# Altium PCB sinking-clock_LED-PCB.PcbDoc (part 2 of 2)
Units mm, origin at the board's own origin, x right, y up, seen from the top; angles counter-clockwise.
Board outline 156.7 x 83 mm, 2 copper layers (Top Layer, Bottom Layer); 144 components, 146 nets, 484 pads, 126 vias.
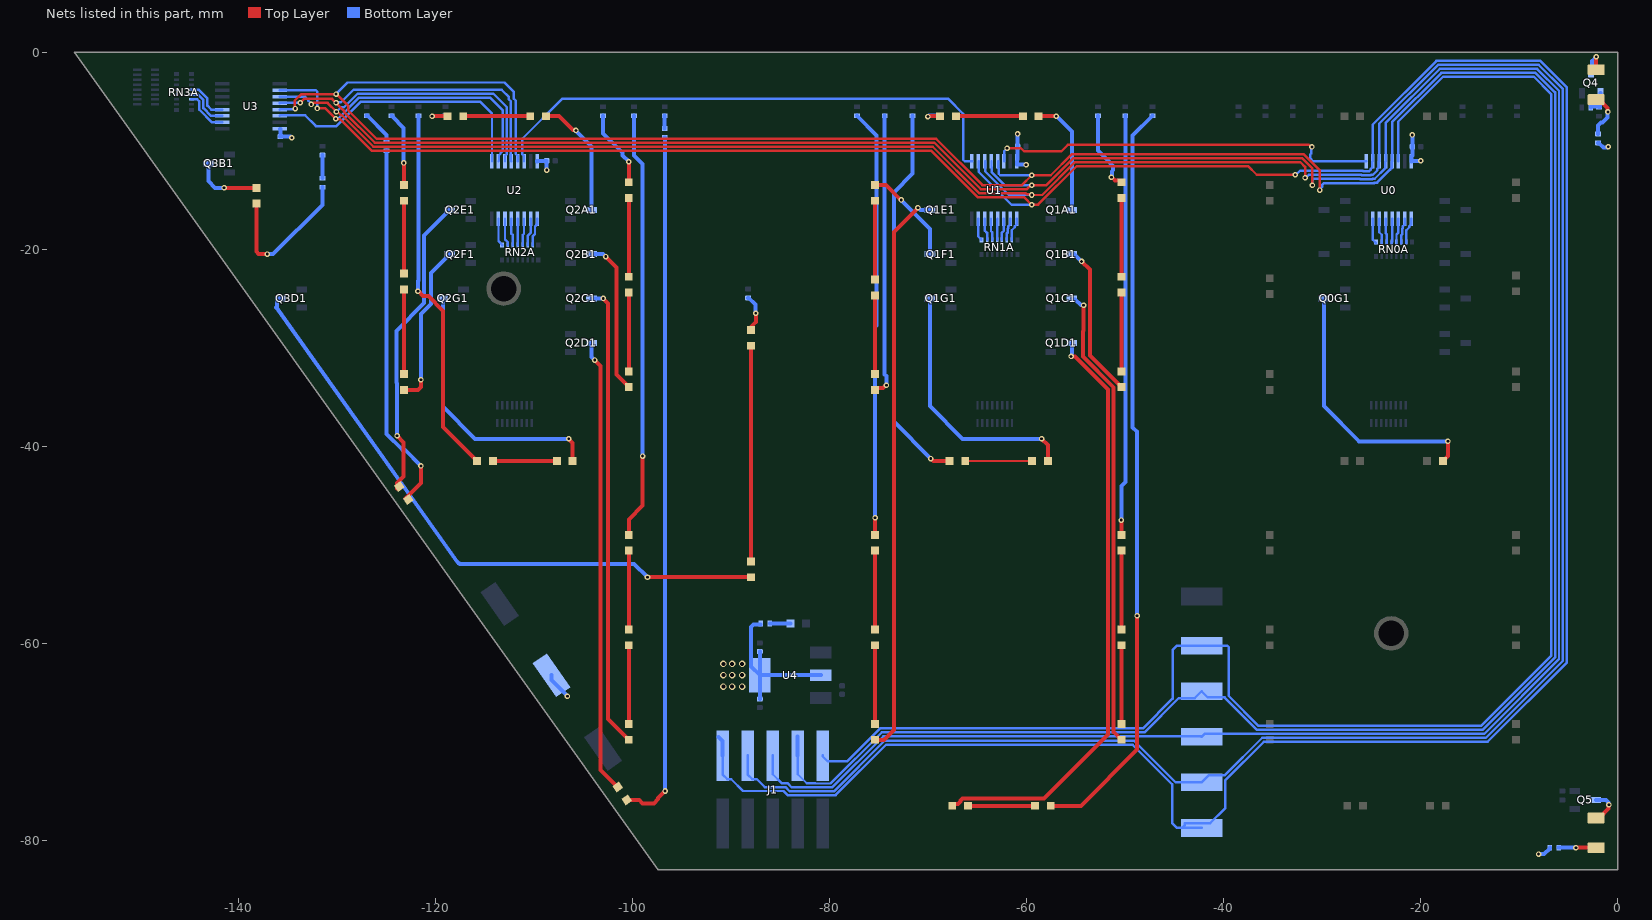
[diagram p2: the nets of this part, all layers, seen from the top]

## Via types
v1: diameter 0.559, hole 0.279, Top Layer to Bottom Layer, 104 vias
v2: diameter 0.66, hole 0.406, Top Layer to Bottom Layer, 22 vias

## Nets (pads, with @x,y where several pads share a name; then routed paths per layer and width w, separated by ;. In a path a pad name is that pad's centre, name@x,y a point inside that pad or via, vN(x,y) a via of type N, cw(c..) or ccw(c..) an arc to the next point about the centre after c; other vN are vias at no path point) (continued)
NetD0G2_2: D0G2.2 Q0G1.3 | length 27.2
  Top Layer w0.406: D0G2.2@-17.755,-41.5 -17.25,-40.995 v1(-17.25,-39.5)
  Bottom Layer w0.406: Q0G1.3@-29.82,-25 -29.82,-35.93 -26.25,-39.5 v1(-17.25,-39.5)
NetD1A1_1: D1A1.1 R1A2.1 | length 2.6
  Top Layer w0.406: v1(-70.032,-6.541) -69.991,-6.541 -69.927,-6.478 -68.823,-6.478 D1A1.1@-68.8,-6.5
  Bottom Layer w0.406: v1(-70.032,-6.541) -69.991,-6.541 -69.905,-6.455 R1A2.1@-68.75,-6.455
NetD1A1_2: D1A1.2 D1A2.1 | length 6.8
  Top Layer w0.406: D1A1.2@-67.2,-6.5 D1A2.1@-60.4,-6.5
NetD1A2_2: D1A2.2 Q1A1.3 | length 12
  Top Layer w0.406: D1A2.2@-58.8,-6.5 v1(-57,-6.5)
  Bottom Layer w0.406: v1(-57,-6.5) -55.43,-8.07 Q1A1.3@-55.43,-16
NetD1B1_1: D1B1.1 R1B2.1 | length 8.1
  Top Layer w0.406: v1(-51.4,-12.699) -51.359,-12.699 -51.055,-13.003 -50.597,-13.003 D1B1.1@-50.4,-13.2
  Bottom Layer w0.406: R1B2.1@-52.75,-6.455 -52.75,-10 -51.494,-11.256 -51.494,-11.313 -51.244,-11.563 -51.244,-11.969 -51.371,-12.096 -51.371,-12.67 v1(-51.4,-12.699)
NetD1B1_2: D1B1.2 D1B2.1 | length 8
  Top Layer w0.406: D1B2.1@-50.4,-22.8 D1B1.2@-50.4,-14.8
NetD1B2_2: D1B2.2 D1B3.1 | length 8
  Top Layer w0.406: D1B3.1@-50.4,-32.4 D1B2.2@-50.4,-24.4
NetD1B3_2: D1B3.2 Q1B1.3 | length 15.7
  Top Layer w0.406: v1(-54.44,-21.25) -53.605,-22.085 -53.605,-30.795 D1B3.2@-50.4,-34
  Bottom Layer w0.406: Q1B1.3@-55.43,-20.5 -55.19,-20.5 v1(-54.44,-21.25)
NetD1C1_1: D1C1.1 R1C2.1 | length 42.7
  Top Layer w0.406: D1C1.1@-50.4,-49 v1(-50.4,-47.5)
  Bottom Layer w0.406: v1(-50.4,-47.5) -50.4,-44.041 -50,-43.641 R1C2.1@-50,-6.455
NetD1C1_2: D1C1.2 D1C2.1 | length 7.7
  Top Layer w0.406: D1C2.1@-50.4,-58.5 D1C1.2@-50.4,-50.75
NetD1C2_2: D1C2.2 D1C3.1 | length 8
  Top Layer w0.406: D1C3.1@-50.4,-68.2 D1C2.2@-50.4,-60.2
NetD1C3_2: D1C3.2 Q1C1.3 | length 47.2
  Top Layer w0.406: v1(-54.24,-25.7) -54.24,-28.277 -54.309,-28.346 -54.309,-30.881 -51.172,-34.019 -51.172,-69.028 D1C3.2@-50.4,-69.8
  Bottom Layer w0.406: Q1C1.3@-55.43,-25 -55.328,-25.102 -55.088,-25.102 -54.519,-25.671 -54.269,-25.671 v1(-54.24,-25.7)
NetD1D1_1: D1D1.1 R1D2.1 | length 76.5
  Top Layer w0.406: D1D1.1@-57.564,-76.5 -54.5,-76.5 -48.8,-70.8 v1(-48.8,-57.2)
  Bottom Layer w0.406: v1(-48.8,-57.2) -48.8,-38.532 -49.25,-38.082 -49.25,-8.455 R1D2.1@-47.25,-6.455
NetD1D1_2: D1D1.2 D1D2.1 | length 6.8
  Top Layer w0.406: D1D2.1@-65.964,-76.5 D1D1.2@-59.164,-76.5
NetD1D2_2: D1D2.2 Q1D1.3 | length 60.4
  Top Layer w0.406: D1D2.2@-67.564,-76.5 -67.367,-76.303 -66.958,-76.303 -66.72,-76.065 -66.72,-75.953 -66.511,-75.744 -58.244,-75.744 -51.75,-69.25 -51.75,-34.25 -55.089,-30.911 -55.471,-30.911 v1(-55.5,-30.881)
  Bottom Layer w0.406: v1(-55.5,-30.881) -55.5,-30.84 -55.43,-30.77 Q1D1.3@-55.43,-29.5
NetD1E1_1: D1E1.1 R1E2.1 | length 43.4
  Top Layer w0.406: D1E1.1@-75.4,-49 v1(-75.4,-47.25)
  Bottom Layer w0.406: R1E2.1@-77.25,-6.455 -75.25,-8.455 -75.25,-27.757 -75.4,-27.907 v1(-75.4,-47.25)
NetD1E1_2: D1E1.2 D1E2.1 | length 7.5
  Top Layer w0.406: D1E2.1@-75.4,-58.5 D1E1.2@-75.4,-51
NetD1E2_2: D1E2.2 D1E3.1 | length 8
  Top Layer w0.406: D1E3.1@-75.4,-68.2 D1E2.2@-75.4,-60.2
NetD1E3_2: D1E3.2 Q1E1.3 | length 57.6
  Top Layer w0.406: D1E3.2@-75.4,-69.8 -74.5,-69.8 -73.5,-68.8 -73.5,-18.25 v1(-71.051,-15.801)
  Bottom Layer w0.406: v1(-71.051,-15.801) -71.01,-15.801 -70.811,-16 Q1E1.3@-69.82,-16
NetD1F1_1: D1F1.1 R1F2.1 | length 28.8
  Top Layer w0.406: D1F1.1@-75.4,-34.286 -75.203,-34.089 -74.578,-34.089 -74.291,-33.802 v1(-74.25,-33.802)
  Bottom Layer w0.406: R1F2.1@-74.417,-6.455 -74.417,-32.71 -74.25,-32.877 v1(-74.25,-33.802)
NetD1F1_2: D1F1.2 D1F2.1 | length 8
  Top Layer w0.406: D1F1.2@-75.4,-32.686 D1F2.1@-75.4,-24.686
NetD1F2_2: D1F2.2 D1F3.1 | length 8
  Top Layer w0.406: D1F2.2@-75.4,-23.086 D1F3.1@-75.4,-15.086
NetD1F3_2: D1F3.2 Q1F1.3 | length 10
  Top Layer w0.406: D1F3.2@-75.4,-13.486 -75.393,-13.493 -74.298,-13.493 -72.791,-15 v1(-72.75,-15)
  Bottom Layer w0.406: v1(-72.75,-15) -69.82,-17.93 Q1F1.3@-69.82,-20.5
NetD1G1_1: D1G1.1 R1G2.1 | length 39.1
  Top Layer w0.406: v1(-69.75,-41.25) -69.709,-41.25 -69.459,-41.5 D1G1.1@-67.85,-41.5
  Bottom Layer w0.406: R1G2.1@-71.583,-6.455 -71.583,-12.333 -73.5,-14.25 -73.5,-37.5 v1(-69.75,-41.25)
NetD1G1_2: D1G1.2 D1G2.1 | length 6.8
  Top Layer w0.25: D1G1.2@-66.25,-41.5 D1G2.1@-59.45,-41.5
NetD1G2_2: D1G2.2 Q1G1.3 | length 26.1
  Top Layer w0.406: v1(-58.5,-39.25) -57.85,-39.9 D1G2.2@-57.85,-41.5
  Bottom Layer w0.406: Q1G1.3@-69.82,-25 -69.82,-35.93 -66.5,-39.25 v1(-58.5,-39.25)
NetD2A1_1: D2A1.1 R2A2.1 | length 3
  Top Layer w0.406: v1(-120.375,-6.5) D2A1.1@-118.8,-6.5
  Bottom Layer w0.406: v1(-120.375,-6.5) -120.352,-6.478 -119.023,-6.478 R2A2.1@-119,-6.455
NetD2A1_2: D2A1.2 D2A2.1 | length 6.8
  Top Layer w0.406: D2A1.2@-117.2,-6.5 D2A2.1@-110.4,-6.5
NetD2A2_2: D2A2.2 Q2A1.3 | length 12.3
  Top Layer w0.406: D2A2.2@-108.8,-6.5 -107.5,-6.5 -106.086,-7.914 -105.795,-7.914 v1(-105.766,-7.943)
  Bottom Layer w0.406: v1(-105.766,-7.943) -105.766,-7.984 -104.18,-9.57 Q2A1.3@-104.18,-16
NetD2B1_1: D2B1.1 R2B2.1 | length 7.8
  Top Layer w0.406: D2B1.1@-100.4,-13.2 v1(-100.4,-11.116)
  Bottom Layer w0.406: R2B2.1@-103,-6.455 -103,-8.25 -101.04,-10.21 -101.04,-10.476 v1(-100.4,-11.116)
NetD2B1_2: D2B1.2 D2B2.1 | length 8
  Top Layer w0.406: D2B2.1@-100.4,-22.8 D2B1.2@-100.4,-14.8
NetD2B2_2: D2B2.2 D2B3.1 | length 8
  Top Layer w0.406: D2B3.1@-100.4,-32.4 D2B2.2@-100.4,-24.4
NetD2B3_2: D2B3.2 Q2B1.3 | length 15.8
  Top Layer w0.406: v1(-102.75,-20.75) -101.659,-21.841 -101.659,-32.741 D2B3.2@-100.4,-34
  Bottom Layer w0.406: Q2B1.3@-104.18,-20.5 -103,-20.5 v1(-102.75,-20.75)
NetD2C1_1: D2C1.1 R2C2.1 | length 43.5
  Top Layer w0.406: D2C1.1@-100.4,-49 -100.4,-47.441 -99,-46.041 v1(-99,-41)
  Bottom Layer w0.406: R2C2.1@-99.875,-6.455 -99.875,-10.477 -99,-11.352 v1(-99,-41)
NetD2C1_2: D2C1.2 D2C2.1 | length 8
  Top Layer w0.406: D2C2.1@-100.4,-58.6 D2C1.2@-100.4,-50.6
NetD2C2_2: D2C2.2 D2C3.1 | length 8
  Top Layer w0.406: D2C3.1@-100.4,-68.2 D2C2.2@-100.4,-60.2
NetD2C3_2: D2C3.2 Q2C1.3 | length 47.1
  Top Layer w0.406: v1(-103,-25) -102.5,-25.5 -102.5,-67.7 D2C3.2@-100.4,-69.8
  Bottom Layer w0.406: Q2C1.3@-104.18,-25 v1(-103,-25)
NetD2D1_1: D2D1.1 R2D2.1 | length 71
  Top Layer w0.406: D2D1.1@-100.609,-75.901 -99.337,-75.901 -98.989,-76.25 -97.85,-76.25 -97.429,-75.829 -97.429,-75.715 v1(-96.714,-75)
  Bottom Layer w0.406: R2D2.1@-96.75,-8.66 -96.732,-8.678 -96.732,-74.982 v1(-96.714,-75)
NetD2D1_2: D2D1.2 Q2D1.3 | length 46.2
  Top Layer w0.406: v1(-103.86,-31.25) -103.25,-31.86 -103.25,-72.868 D2D1.2@-101.527,-74.591
  Bottom Layer w0.406: Q2D1.3@-104.18,-29.5 -104.18,-30.93 v1(-103.86,-31.25)
NetD2E1_1: D2E1.1 R2E2.1 | length 37.5
  Top Layer w0.406: D2E1.1@-123.046,-45.296 -121.5,-43.75 v1(-121.5,-42)
  Bottom Layer w0.406: R2E2.1@-125,-10 -125,-38.75 -123.39,-40.36 -123.14,-40.36 v1(-121.5,-42)
NetD2E1_2: D2E1.2 Q2E1.3 | length 31.3
  Top Layer w0.406: D2E1.2@-123.926,-44.313 -123.931,-44.308 -123.931,-43.755 -123.25,-43.074 -123.25,-39.602 v1(-123.926,-38.926)
  Bottom Layer w0.406: v1(-123.926,-38.926) -123.926,-33.623 -124,-33.549 -124,-28.287 -121.169,-25.456 -121.169,-18.599 -118.912,-16.342 -118.912,-16.102 -118.81,-16 Q2E1.3@-118.57,-16
NetD2F1_1: D2F1.1 R2F2.1 | length 7.6
  Top Layer w0.406: v1(-123.25,-11.25) -123.25,-11.291 -123.2,-11.341 D2F1.1@-123.2,-13.486
  Bottom Layer w0.406: R2F2.1@-124.5,-6.455 -124.445,-6.455 -124.403,-6.497 -124.403,-6.552 -123.25,-7.705 v1(-123.25,-11.25)
NetD2F1_2: D2F1.2 D2F2.1 | length 7.4
  Top Layer w0.406: D2F2.1@-123.2,-22.486 D2F1.2@-123.2,-15.086
NetD2F2_2: D2F2.2 D2F3.1 | length 8.6
  Top Layer w0.406: D2F3.1@-123.2,-32.686 D2F2.2@-123.2,-24.086
NetD2F3_2: D2F3.2 Q2F1.3 | length 16.5
  Top Layer w0.406: D2F3.2@-123.2,-34.286 -121.786,-34.286 -121.5,-34 v1(-121.5,-33.25)
  Bottom Layer w0.406: v1(-121.5,-33.25) -121.5,-26.577 -120.5,-25.577 -120.5,-22.43 Q2F1.3@-118.57,-20.5
NetD2G1_1: D2G1.1 R2G2.1 | length 37.9
  Top Layer w0.406: v1(-121.804,-24.265) -121.763,-24.265 -121.268,-24.76 -120.755,-24.76 -119.25,-26.265 -119.25,-38.05 D2G1.1@-115.8,-41.5
  Bottom Layer w0.406: v1(-121.804,-24.265) -121.804,-23.227 -121.75,-23.173 R2G2.1@-121.75,-6.455
NetD2G1_2: D2G1.2 D2G2.1 | length 6.5
  Top Layer w0.406: D2G1.2@-114.2,-41.5 D2G2.1@-107.7,-41.5
NetD2G2_2: D2G2.2 Q2G1.3 | length 27.4
  Top Layer w0.406: v1(-106.5,-39.25) -106.5,-39.291 -106.1,-39.691 D2G2.2@-106.1,-41.5
  Bottom Layer w0.406: Q2G1.3@-119.267,-25.102 -119.267,-35.983 -116,-39.25 v1(-106.5,-39.25)
NetD3B1_1: D3B1.1 R3B2.1 | length 15.6
  Top Layer w0.406: D3B1.1@-138.2,-15.372 -138.202,-15.374 -138.202,-20.256 -137.964,-20.494 -137.106,-20.494 v1(-137.1,-20.5)
  Bottom Layer w0.406: v1(-137.1,-20.5) -136.5,-20.5 -131.5,-15.5 R3B2.1@-131.5,-13.705
NetD3B1_2: D3B1.2 Q3B1.3 | length 6.9
  Top Layer w0.406: v1(-141.478,-13.772) D3B1.2@-138.2,-13.772
  Bottom Layer w0.406: Q3B1.3@-143.07,-11.3 -143.07,-13.102 -142.4,-13.772 v1(-141.478,-13.772)
NetD3D1_1: D3D1.1 R3D2.1 | length 3.5
  Top Layer w0.406: D3D1.1@-88,-27.896 -87.511,-27.406 v1(-87.511,-26.5)
  Bottom Layer w0.406: R3D2.1@-88.278,-24.939 -88.223,-24.939 -87.54,-25.622 -87.54,-26.471 v1(-87.511,-26.5)
NetD3D1_2: D3D1.2 D3D2.1 | length 21.9
  Top Layer w0.406: D3D2.1@-88,-51.7 D3D1.2@-88,-29.8
NetD3D2_2: D3D2.2 Q3D1.3 | length 63.4
  Top Layer w0.406: v1(-98.5,-53.3) -88.05,-53.3 D3D2.2@-88,-53.25
  Bottom Layer w0.406: Q3D1.3@-135.75,-25 -135.99,-25 -136.092,-25.102 -136.092,-25.807 -136.2,-25.915 -117.783,-51.77 ccw(c-117.452,-51.535) -117.452,-51.941 -99.859,-51.941 v1(-98.5,-53.3)
NetD4_1: D4.1 R6.2 | length 4.7
  Top Layer w0.406: D4.1@-2.2,-4.81 -1.885,-4.81 -1.036,-5.659 -1.036,-6.043 v1(-1.007,-6.072)
  Bottom Layer w0.406: R6.2@-2,-8.295 -2,-7.44 -1.716,-7.157 -1.557,-7.157 -1.036,-6.636 -1.036,-6.101 v1(-1.007,-6.072)
NetD4_2: D4.2 Q4.3 | length 3.1
  Top Layer w0.406: D4.2@-2.2,-1.79 v1(-2.2,-0.455)
  Bottom Layer w0.406: Q4.3@-2.7,-2.03 -2.598,-1.928 -2.598,-0.895 -2.2,-0.497 v1(-2.2,-0.455)
NetD5_1: D5.1 R7.2 | length 3.8
  Top Layer w0.406: v1(-4.25,-80.76) D5.1@-2.2,-80.76
  Bottom Layer w0.406: R7.2@-6,-80.76 v1(-4.25,-80.76)
NetD5_2: D5.2 Q5.3 | length 3.7
  Top Layer w0.406: D5.2@-2.2,-77.74 -1.885,-77.74 -0.929,-76.784 -0.929,-76.429 v1(-0.9,-76.4)
  Bottom Layer w0.406: Q5.3@-2.23,-75.9 -1.208,-75.9 -0.929,-76.179 -0.929,-76.371 v1(-0.9,-76.4)
NetD6_1: D6.1 R8.1 | length 2.1
  Bottom Layer w0.406: R8.1@-86.069,-58 D6.1@-83.979,-58
NetQ4_1: Q4.1 R9.2 R10.2 | length 2.4
  Bottom Layer w0.406: R10.2@-2.745,-5.6 -2.745,-5.576 -2.703,-5.534 R9.2@-1.929,-5.534 ; R9.2@-1.929,-5.557 -1.832,-5.557 -1.832,-5.366 -1.785,-5.319 Q4.1@-1.785,-4.17
NetR2D1_1: R2D1.1 R2D2.2 | length 1.3
  Bottom Layer w0.406: R2D2.2@-96.75,-7.75 R2D1.1@-96.75,-6.455
NetR2E1_1: R2E1.1 R2E2.2 | length 3.5
  Bottom Layer w0.406: R2E1.1@-127,-6.455 -126.945,-6.455 -125,-8.4 R2E2.2@-125,-9.09
NetR3B1_1: R3B1.1 R3B2.2 | length 2.3
  Bottom Layer w0.406: R3B2.2@-131.5,-12.795 R3B1.1@-131.5,-10.455
NetRN0A_9: RN0A.9 U0.7 | length 2.6
  Bottom Layer w0.25: U0.7@-24.876,-16.921 -24.876,-19.046 -24.557,-19.365 RN0A.9@-24.557,-19.402
NetRN0A_10: RN0A.10 U0.6 | length 2.6
  Bottom Layer w0.25: U0.6@-24.215,-16.921 -24.215,-18.284 -23.97,-18.529 RN0A.10@-23.97,-19.402
NetRN0A_11: RN0A.11 U0.5 | length 2.5
  Bottom Layer w0.25: U0.5@-23.58,-16.921 -23.58,-18.35 -23.47,-18.46 RN0A.11@-23.47,-19.402
NetRN0A_12: RN0A.12 U0.4 | length 2.5
  Bottom Layer w0.25: RN0A.12@-22.97,-19.402 -22.97,-19.277 -22.92,-19.227 U0.4@-22.92,-16.921
NetRN0A_13: RN0A.13 U0.3 | length 2.6
  Bottom Layer w0.25: RN0A.13@-22.47,-19.402 -22.47,-18.497 -22.285,-18.312 U0.3@-22.285,-16.921
NetRN0A_14: RN0A.14 U0.2 | length 2.6
  Bottom Layer w0.25: RN0A.14@-21.97,-19.402 -21.97,-18.578 -21.882,-18.49 -21.882,-17.917 -21.83,-17.864 -21.83,-17.685 -21.624,-17.48 U0.2@-21.624,-16.921
NetRN0A_15: RN0A.15 U0.1 | length 2.7
  Bottom Layer w0.25: RN0A.15@-21.47,-19.402 -21.47,-18.073 -21.169,-17.773 -21.169,-17.679 -21.023,-17.533 -21.017,-17.533 -20.964,-17.48 U0.1@-20.964,-16.921
NetRN1A_9: RN1A.9 U1.7 | length 2.3
  Bottom Layer w0.25: U1.7@-64.926,-16.921 -64.926,-18.696 -64.607,-19.015 RN1A.9@-64.607,-19.052
NetRN1A_10: RN1A.10 U1.6 | length 2.2
  Bottom Layer w0.25: U1.6@-64.265,-16.921 -64.265,-18.109 -64.02,-18.354 RN1A.10@-64.02,-19.052
NetRN1A_11: RN1A.11 U1.5 | length 2.2
  Bottom Layer w0.25: U1.5@-63.63,-16.921 -63.63,-18.175 -63.52,-18.285 RN1A.11@-63.52,-19.052
NetRN1A_12: RN1A.12 U1.4 | length 2.2
  Bottom Layer w0.25: RN1A.12@-63.02,-19.052 -63.02,-16.971 U1.4@-62.97,-16.921
NetRN1A_13: RN1A.13 U1.3 | length 2.2
  Bottom Layer w0.25: RN1A.13@-62.52,-19.052 -62.52,-18.322 -62.335,-18.137 U1.3@-62.335,-16.921
NetRN1A_14: RN1A.14 U1.2 | length 2.3
  Bottom Layer w0.25: RN1A.14@-62.02,-19.052 -62.02,-18.403 -61.932,-18.315 -61.932,-17.917 -61.88,-17.864 -61.88,-17.685 -61.674,-17.48 U1.2@-61.674,-16.921
NetRN1A_15: RN1A.15 U1.1 | length 2.3
  Bottom Layer w0.25: RN1A.15@-61.52,-19.052 -61.52,-18.073 -61.219,-17.773 -61.219,-17.679 -61.073,-17.533 -61.067,-17.533 -61.014,-17.48 U1.1@-61.014,-16.921
NetRN2A_9: RN2A.9 U2.7 | length 2.8
  Bottom Layer w0.25: U2.7@-113.626,-16.921 -113.626,-19.179 -113.257,-19.548 RN2A.9@-113.257,-19.585
NetRN2A_10: RN2A.10 U2.6 | length 2.8
  Bottom Layer w0.25: U2.6@-112.965,-16.921 -112.965,-19.002 -112.67,-19.298 RN2A.10@-112.67,-19.585
NetRN2A_11: RN2A.11 U2.5 | length 2.7
  Bottom Layer w0.25: U2.5@-112.33,-16.921 -112.33,-18.416 -112.17,-18.577 RN2A.11@-112.17,-19.585
NetRN2A_12: RN2A.12 U2.4 | length 2.7
  Bottom Layer w0.25: RN2A.12@-111.67,-19.585 U2.4@-111.67,-16.921
NetRN2A_13: RN2A.13 U2.3 | length 2.7
  Bottom Layer w0.25: RN2A.13@-111.17,-19.585 -111.17,-18.564 -111.035,-18.429 U2.3@-111.035,-16.921
NetRN2A_14: RN2A.14 U2.2 | length 2.8
  Bottom Layer w0.25: RN2A.14@-110.67,-19.585 -110.67,-18.644 -110.374,-18.349 U2.2@-110.374,-16.921
NetRN2A_15: RN2A.15 U2.1 | length 2.9
  Bottom Layer w0.25: RN2A.15@-110.17,-19.585 -110.17,-18.713 -109.919,-18.462 -109.919,-17.679 -109.773,-17.533 -109.767,-17.533 -109.714,-17.48 U2.1@-109.714,-16.921
NetRN3A_12: RN3A.12 U3.4 | length 4.4
  Bottom Layer w0.25: RN3A.12@-144.807,-3.8 -144.065,-3.8 -143.178,-4.687 -143.178,-5.433 -142.781,-5.83 U3.4@-141.671,-5.83
NetRN3A_13: RN3A.13 U3.3 | length 4.5
  Bottom Layer w0.25: RN3A.13@-144.807,-4.3 -144.134,-4.3 -143.581,-4.853 -143.581,-5.683 -142.798,-6.465 U3.3@-141.671,-6.465
NetRN3A_14: RN3A.14 U3.2 | length 4.6
  Bottom Layer w0.25: RN3A.14@-144.807,-4.8 -144.203,-4.8 -143.983,-5.02 -143.983,-5.849 -142.707,-7.126 U3.2@-141.671,-7.126
NetU0_9: U0.9 U1.14 | length 39.9
  Top Layer w0.25: v1(-62,-9.75) -60.584,-9.75 -60.277,-10.057 -56.486,-10.057 -55.824,-9.394 -31.37,-9.394 -31.14,-9.624 v1(-31.056,-9.624)
  Bottom Layer w0.25: U1.14@-62.285,-11.079 -62.285,-10.039 -62,-9.754 v1(-62,-9.75) ; v1(-31.056,-9.624) -31.116,-9.683 -31.116,-10.278 -31.241,-10.404 -31.241,-10.759 -30.921,-11.079 U0.9@-25.536,-11.079
NetU1_9: U1.9 U2.14 | length 55.1
  Bottom Layer w0.25: U2.14@-111.035,-11.079 -111.035,-10.52 -111.215,-10.34 -111.215,-8.79 -107.175,-4.75 -67.963,-4.75 -66.443,-6.269 -66.443,-10.933 -66.297,-11.079 U1.9@-65.536,-11.079
NetU2_9: U2.9 U3.14 | length 28.4
  Bottom Layer w0.25: U3.14@-135.829,-6.465 -135.789,-6.425 -133.237,-6.425 -132.157,-7.505 -130.085,-7.505 -127.602,-5.023 -115.502,-5.023 -114.286,-6.238 U2.9@-114.286,-11.079
SHIFT_DATA_CLK: J1.8 TP6.1 U0.11 U1.11 U2.11 U3.11 | length 329.1
  Top Layer w0.25: v1(-132.627,-5.307) -132.543,-5.307 -132.389,-5.152 -130.966,-5.152 v1(-130.073,-6.045) ; v1@-130.107,-6.08 -129.955,-6.08 -129.632,-6.402 -129.529,-6.402 -126.333,-9.598 -69.541,-9.598 -64.833,-14.305 -60.126,-14.305 -59.99,-14.441 -59.606,-14.441 -59.547,-14.5 v1(-59.496,-14.5) -58.432,-14.5 -55.092,-11.16 -32.236,-11.16 -31.75,-11.646 v1(-31.75,-12.75)
  Bottom Layer w0.25: U3.11@-135.829,-4.535 -133.238,-4.535 -132.921,-4.852 -132.921,-4.929 -132.627,-5.223 v1(-132.627,-5.307) ; v1(-130.073,-6.045) -130.043,-6.045 -129.595,-5.597 -129.315,-5.597 -127.936,-4.218 -114.145,-4.218 -112.785,-5.578 -112.785,-10.34 -112.965,-10.52 U2.11@-112.965,-11.079 ; J1.8@-88.33,-71.392 -88.33,-73.327 -87.85,-73.807 -87.393,-73.807 -86.602,-74.598 -84.502,-74.598 -84.077,-75.023 -81.824,-75.023 -81.803,-75.043 -79.586,-75.043 -74.445,-69.902 -49.098,-69.902 -44.875,-74.125 TP6.1@-42.25,-74.125 -41.547,-73.422 -39.922,-73.422 -36.098,-69.598 -13.39,-69.598 -5.57,-61.777 -5.57,-3.749 -8.026,-1.293 -18.25,-1.293 -24.215,-7.258 U0.11@-24.215,-11.079 -24.268,-11.132 -24.268,-11.691 -24.42,-11.843 -24.42,-12.008 -24.858,-12.445 -25.026,-12.445 -25.077,-12.495 -25.995,-12.495 -26.046,-12.445 -31.362,-12.445 -31.666,-12.75 v1(-31.75,-12.75) ; U1.11@-64.215,-11.079 -64.212,-11.082 -64.212,-12.113 -61.825,-14.5 v1(-59.496,-14.5)
SHIFT_DATA_IN: J1.2 TP3.1 U0.14 | length 170.4
  Bottom Layer w0.25: J1.2@-80.71,-71.392 -80.71,-71.49 -80.2,-72 -78.25,-72 -74.89,-68.64 -48.209,-68.64 -45.189,-65.62 -45.189,-60.689 -44.75,-60.25 TP3.1@-42.25,-60.25 -39.646,-60.25 -39.5,-60.396 -39.5,-65.348 -36.457,-68.39 -13.89,-68.39 -6.777,-61.277 -6.777,-4.249 -8.526,-2.5 -17.75,-2.5 -22.296,-7.046 -22.296,-11.068 U0.14@-22.285,-11.079
SHIFT_MCLR: J1.10 TP7.1 U0.10 U1.10 U2.10 U3.10 | length 346.3
  Top Layer w0.25: v1(-132.012,-5.709) -131.976,-5.673 -131.232,-5.673 -130.153,-6.753 v1(-130.143,-6.753) ; v1@-130.114,-6.791 -130.107,-6.791 -130.094,-6.805 -129.695,-6.805 -126.5,-10 -69.707,-10 -64.957,-14.75 -60.25,-14.75 v1(-59.5,-15.5) -59.483,-15.483 -58.846,-15.483 -54.926,-11.563 -37.539,-11.563 -36.656,-12.445 v1(-32.75,-12.445)
  Bottom Layer w0.25: U3.10@-135.829,-3.874 -132.158,-3.874 -132.012,-4.021 v1(-132.012,-5.709) ; v1(-130.143,-6.753) -130.084,-6.694 -129.843,-6.694 -127.769,-4.62 -114.488,-4.62 -113.188,-5.92 -113.188,-9.995 -113.42,-10.227 -113.42,-10.315 -113.573,-10.467 -113.573,-11.026 U2.10@-113.626,-11.079 ; J1.10@-90.87,-71.392 -90.87,-73.327 -90.39,-73.807 -89.993,-73.807 -88.8,-75 -84.7,-75 -84.275,-75.425 -81.991,-75.425 -81.97,-75.446 -79.47,-75.446 -79.449,-75.425 -79.399,-75.425 -74.278,-70.305 -49.264,-70.305 -45.25,-74.319 -45.25,-78.25 -44.75,-78.75 -44.43,-78.75 ; U1.10@-64.876,-11.079 -64.873,-11.082 -64.873,-12.161 -61.521,-15.513 -60.674,-15.513 -60.661,-15.5 v1(-59.5,-15.5) ; TP7.1@-42.25,-78.75 -44.43,-78.75 ; v1(-32.75,-12.445) -32.666,-12.445 -32.264,-12.043 -25.879,-12.043 -25.829,-12.093 -25.243,-12.093 -25.081,-11.931 -25.081,-11.843 -24.928,-11.691 -24.928,-11.132 U0.10@-24.876,-11.079 -24.876,-7.349 -18.417,-0.89 -7.86,-0.89 -5.168,-3.582 -5.168,-61.944 -13.224,-70 -35.931,-70 -39.873,-73.942 -39.873,-76.76 -41.372,-78.26 -43.94,-78.26 -43.94,-78.465 -44.225,-78.75 -44.43,-78.75
  Bottom Layer w0.406: J1.10@-91.302,-69.503 -90.87,-69.934 J1.10@-90.87,-71.392
SHIFT_OUTPUT_EN: J1.4 TP4.1 U0.13 U1.13 U2.13 U3.13 | length 325.2
  Top Layer w0.25: v1(-134.25,-5.721) -134.307,-5.664 -134.307,-4.916 -133.641,-4.25 v1(-130.114,-4.25) -130.057,-4.25 -128.892,-5.415 -128.892,-5.901 -126,-8.793 -69.207,-8.793 -64.5,-13.5 -60.496,-13.5 v1(-59.496,-12.5) -57.57,-12.5 -55.426,-10.356 -31.903,-10.356 -30.25,-12.008 v1(-30.25,-14)
  Bottom Layer w0.25: U3.13@-135.829,-5.83 -135.776,-5.777 -134.306,-5.777 v1(-134.25,-5.721) ; v1(-130.114,-4.25) -128.946,-3.081 -113.034,-3.081 -112.064,-4.051 -112.064,-4.731 -111.875,-4.92 -111.875,-10.321 -111.729,-10.467 -111.723,-10.467 -111.67,-10.52 U2.13@-111.67,-11.079 ; J1.4@-83.25,-71.392 -83.25,-73.297 -82.329,-74.218 -81.49,-74.218 -81.47,-74.238 -79.919,-74.238 -74.724,-69.043 -48.043,-69.043 -44.578,-65.578 -42.953,-65.578 TP4.1@-42.25,-64.875 -41.63,-65.495 -39.921,-65.495 -36.624,-68.793 -13.974,-68.793 -13.724,-68.793 -6.375,-61.444 -6.375,-61.194 -6.375,-4.082 -8.36,-2.098 -17.917,-2.098 -22.92,-7.101 U0.13@-22.92,-11.079 -22.973,-11.132 -22.973,-11.778 -23.125,-11.93 -24.444,-13.25 -24.693,-13.25 -24.743,-13.3 -29.848,-13.3 -30.014,-13.467 -30.014,-13.681 -30.25,-13.916 v1(-30.25,-14) ; U1.13@-62.92,-11.079 -62.917,-11.082 -62.917,-11.787 -62.867,-11.837 -62.867,-12.32 -62.687,-12.5 v1(-59.496,-12.5)
  Bottom Layer w0.406: J1.4@-83.25,-71.392 J1.4@-83.25,-69.487
SHIFT_STORE_CLK: J1.6 TP5.1 U0.12 U1.12 U2.12 U3.12 | length 322.3
  Top Layer w0.25: v1(-133.75,-5.147) -133.353,-4.75 -130.511,-4.75 v1(-130.114,-5.147) -129.295,-5.967 -129.295,-6.067 -126.167,-9.195 -69.374,-9.195 -64.667,-13.902 -59.982,-13.902 -59.58,-13.5 v1(-59.496,-13.5) -58.001,-13.5 -55.259,-10.758 -32.069,-10.758 -31,-11.827 v1(-31,-13.5)
  Bottom Layer w0.25: U3.12@-135.829,-5.17 -135.817,-5.158 -133.762,-5.158 v1(-133.75,-5.147) ; v1(-130.114,-5.147) -130.055,-5.088 -129.613,-5.088 -128.341,-3.815 -113.305,-3.815 -112.562,-4.559 -112.562,-4.802 -112.383,-4.981 -112.383,-10.321 -112.383,-11.026 U2.12@-112.33,-11.079 ; J1.6@-85.79,-71.392 -85.79,-73.297 -84.892,-74.195 -84.305,-74.195 -83.88,-74.62 -81.657,-74.62 -81.637,-74.641 -79.753,-74.641 -74.557,-69.445 -42.305,-69.445 TP5.1@-42.25,-69.5 -41.945,-69.195 -13.557,-69.195 -5.973,-61.611 -5.973,-3.916 -8.193,-1.695 -18.083,-1.695 -23.58,-7.192 U0.12@-23.58,-11.079 -23.633,-11.132 -23.633,-11.804 -24.677,-12.848 -24.86,-12.848 -24.91,-12.898 -26.162,-12.898 -26.212,-12.848 -30.854,-12.848 -31,-12.994 v1(-31,-13.5) ; U1.12@-63.58,-11.079 -63.58,-11.688 -63.577,-11.691 -63.577,-12.179 -62.256,-13.5 v1(-59.496,-13.5)
VCC: C2.2 C3.2 C4A.2 C4B.2 C4C.2 C4D.1 R6.1 R7.1 R8.2 TP2.1 U0.16 U1.16 U2.16 U3.16 U4.2 U4.4 | length 34.4
  Bottom Layer w0.406: U3.16@-135.829,-7.786 -135.802,-7.786 -135.776,-7.811 -135.776,-8.545 -135.789,-8.557 C4D.1@-135.776,-8.57 -134.727,-8.57 v1(-134.621,-8.676) ; U2.16@-109.714,-11.079 -109.714,-11.052 -109.689,-11.026 C4C.2@-108.732,-11.026 v1(-108.732,-11.968) ; TP2.1@-108.25,-63.25 -108.25,-63.75 v1(-106.624,-65.376) ; C2.2@-87.1,-65.67 U4.4@-87.1,-63.25 ; C3.2@-87.1,-60.838 U4.4@-87.1,-63.25 ; R8.2@-87.042,-58.097 -87.762,-58.097 -88,-58.335 -88,-60.627 -87.997,-60.631 -87.997,-62.353 U4.4@-87.1,-63.25 ; U4.2@-80.9,-63.25 U4.4@-87.1,-63.25 ; U1.16@-61.014,-11.079 -61.014,-11.37 -60.989,-11.396 -60.099,-11.396 v1(-60.07,-11.425) ; U1.16@-60.93,-10.881 C4B.2@-60.93,-9.575 v1(-60.93,-8.3) ; U0.16@-20.964,-11.079 -20.964,-11.025 -20.964,-10.571 -20.86,-10.467 v1(-20.86,-8.4) ; U0.16@-20.963,-11.026 v1(-20,-11.026) ; v1(-8.047,-81.4) -7.495,-81.4 -6.91,-80.815 R7.1@-6.91,-80.76 ; R6.1@-2,-9.205 -1.958,-9.247 -1.903,-9.247 -1.473,-9.677 -1.078,-9.677 -1.007,-9.606 v1(-0.966,-9.606)
  other v2: -90.8,-64.4 -89.9,-64.4 -88.9,-64.4 -90.8,-63.25 -89.9,-63.25 -88.9,-63.25 -90.8,-62.1 -89.9,-62.1 -88.9,-62.1
pads on no net: RN0A.1 RN0A.16 RN0B.8 RN0B.9 RN1A.1 RN1A.16 RN1B.8 RN1B.9 RN2A.1 RN2A.16 RN2B.8 RN2B.9 RN3A.1 RN3A.2 RN3A.6 RN3A.7 RN3A.8 RN3A.9 RN3A.10 RN3A.11 RN3A.15 RN3A.16 RN3B.1 RN3B.4 RN3B.5 RN3B.6 RN3B.7 RN3B.8 RN3B.9 RN3B.10 RN3B.11 RN3B.12 RN3B.13 RN3B.16 U0.15 U1.15 U2.15 U3.1 U3.5 U3.6 U3.7 U3.9 U3.15

## Polygon pours and split planes (outlines as drawn)
GND on Bottom Layer "GND_L02_P015" (solid, remove dead copper, pour order 15): 0,0 0,-83 -87.25,-83 -92.5,-83 -97.5,-83 -106,-69.5 -108.513,-65.508 -129.25,-36.25 -135.875,-27.625 -155.25,0
+12 on Bottom Layer "+12_L02_P000" (solid, pour order 0): -83.88,-80.75 -77.5,-80.75 -77.5,-76 -77.75,-76 -83.88,-76
+12 on Bottom Layer "+12_L02_P001" (solid, pour order 1): -82,-65.25 -77.5,-65.25 -77.5,-67.75 -82,-67.75
VCC on Bottom Layer "VCC_L02_P004" (solid, pour order 4): -83,-65 -87.5,-65 -91.4,-65 -91.4,-61.57 -87.5,-61.57 -83.18,-61.57 -82,-62.75 -81.5,-62.75 -81.5,-63.5 -81.75,-63.75 -81.5,-63.5 -81.75,-63.75
VCC on Top Layer "VCC_L01_P020" (solid, pour order 20): -156.106,-0.418 -134,-30 -97,-82 -97,-1
VCC on Top Layer "VCC_L01_P019" (solid, pour order 19): -0.2,-0.001 -0.2,-82.7 -97,-82.7 -97,-0.303
+12 on Top Layer "Top Layer-+12" (solid, pour order 18): -81.3,-80.75 -77.454,-80.75 -76.304,-81.9 -8.404,-81.9 -8.404,-81.2 -1.104,-73.9 -1.104,-8.1 -9.004,-0.2 -127.704,-0.2 -127.704,-5.673 -118.127,-5.673 -117.204,-4.75 -103.704,-4.75 -103.704,-5.75 -95.704,-5.75 -95.704,-4.75 -77.454,-4.75 -77.454,-5.75 -67.954,-5.75 -67.954,-4.75 -53.204,-4.75 -53.204,-5.75 -46.204,-5.75 -46.204,-4.75 -38.704,-4.75 -38.704,-5.75 -29.454,-5.75 -29.454,-4.75 -15.954,-4.75 -15.954,-5.75 -14.316,-5.75 -6.904,-13.162 -6.904,-72.9 -11.104,-77.1 -77.204,-77.1 -77.204,-65.2 -77.254,-65.25 -81.3,-65.25 -81.3,-71.6 -99.604,-71.6 -99.604,-72.2 -81.3,-72.2

## Silkscreen, mask and mechanical layers (free items; w line width, h text height)
Top Overlay:
  lines w0.254: -139.25,-21.5 -139.25,-12 -136.25,-9 -136.25,-25.5 -136.5,-25.75 ; -103.813,-43 -106.25,-43 -118,-43 -120.75,-43 -122.5,-41.25 -120.25,-39 -118,-39 -105.95,-39 -103.7,-39 -101.6,-41.1 -103.5,-43 ; -101.75,-45.14 -101,-44.39 -98.25,-41.64 -98.25,-73.75 -101.75,-70.25 -101.75,-45.125 ; -54.812,-43.25 -57.25,-43.25 -69,-43.25 -71.75,-43.25 -73.5,-41.5 -71.25,-39.25 -69,-39.25 -56.95,-39.25 -54.7,-39.25 -52.6,-41.35 -54.5,-43.25 ; -53,-12.265 -53,-11.75 -49.5,-8.25 -49.5,-36.265 -50.235,-36.265 -53,-33.5 -53,-12.25 ; -12.75,-12.015 -12,-11.265 -9.25,-8.515 -9.25,-36.015 -9.985,-36.015 -12.75,-33.25 -12.75,-12 ; -12.5,-48.14 -11.75,-47.39 -9,-44.64 -9,-72.14 -9.735,-72.14 -12.5,-69.375 -12.5,-48.125 ; -98,-4.25 -125.5,-4.25 -122.75,-7 -122,-7.75 -101.5,-7.75 -98,-4.25 ; -98,-4.25 -98,-4.25 ; -49,-4.25 -76.5,-4.25 -73.75,-7 -73,-7.75 -52.5,-7.75 -49,-4.25 ; -49,-4.25 -49,-4.25 ; -8.75,-4.25 -12.25,-7.75 -32.75,-7.75 -33.5,-7 -36.25,-4.25 -8.75,-4.25 ; -8.75,-4.25 -8.75,-4.25 ; -136.5,-9.25 -136.5,-9.25 ; -125.75,-39.058 -125.75,-9.25 -124.375,-9.25 -122.25,-11.375 -122.25,-33.25 -122.25,-34 -122.25,-35.558 -125.75,-39.058 ; -102,-34.5 -99.985,-36.515 -98.5,-36.515 -98.5,-8.6 -101.25,-11.35 -101.582,-11.682 -102,-12.1 -102,-34.5 ; -76.75,-37.25 -76.75,-9 -76.25,-9 -73.25,-12 -73.25,-33.75 -76.75,-37.25 ; -76.5,-77.75 -73,-74.25 -52.5,-74.25 -51.75,-75 -49,-77.75 -76.5,-77.75 ; -76.5,-72.625 -73.75,-69.875 -73,-69.125 -73,-48 -75.875,-45.125 -76.5,-45.125 -76.5,-72.625 ; -52.75,-69.625 -52.75,-47.75 -52,-47 -49.25,-44.25 -49.25,-72.39 -49.985,-72.39 -52.75,-69.625 ; -36.5,-37 -33.75,-34.25 -33,-33.5 -33,-12 -36.25,-8.75 -36.5,-8.75 -36.5,-37 ; -36.25,-77.5 -8.75,-77.5 -11.5,-74.75 -12.25,-74 -32.75,-74 -36.25,-77.5 ; -36.25,-72.375 -36.25,-44.875 -35.375,-44.875 -32.75,-47.5 -32.75,-68.875 -33.5,-69.625 -36.25,-72.375 ; -33.25,-41.25 -31,-39 -28.75,-39 -16.7,-39 -14.45,-39 -12.35,-41.1 -14.25,-43 -14.563,-43 -17,-43 -28.75,-43 -31.5,-43 -33.25,-41.25
Bottom Overlay:
  drawing of 659 lines, arcs and shapes, not listed
  text "Sinking Clock - LED PCB / Mk. I / Mark Hofmeister / HofLab, 7/2023" at -70.86,-53.25 h3
  text "GND" at -34.75,-56 h2
  text "GND" at -110.982,-56.487 h2 r305
  text "VCC->" at -73.454,-58.746 h1.52
  text "SHIFT_DATA_IN" at -25.5,-61 h2
  text "VCC" at -105.733,-63.736 h2 r305
  text "SHIFT_OUTPUT_EN" at -22.75,-65.75 h2
  text "SHIFT_STORE_CLK" at -22.884,-70.5 h2
  text "+12V" at -100.25,-71.25 h2 r305
  text "SHIFT_DATA_CLK" at -24.25,-75 h2
  text "SHIFT_MCLR" at -28.5,-79.75 h2
Outline:
  the board outline again, w0.254
Mechanical 15:
  text "sinking-clock_LED-PCB / 1. 2 layers / 2. Copper Thickness: 1 oz  / 3. Dielectric Material: FR4 or HofLabs approved substitute / 4. Plating Finish: HASL lead or HofLabs approved substitute / 5. PCB Thickness: 1.6 mm  / 6. Soldermask Color: Green or HofLabs approved substitute / 7. Silkscreen Color: White or HofLabs approved substitute / 8. Vias are tented" at 14,-55.6 h2

## Dimensions
0,-83 to -97.4,-83 on Mechanical 1
0,0 to 0,-83 on Mechanical 1
0,0 to -156.7,0 on Mechanical 1